# Allegro board extend-pcb.brd
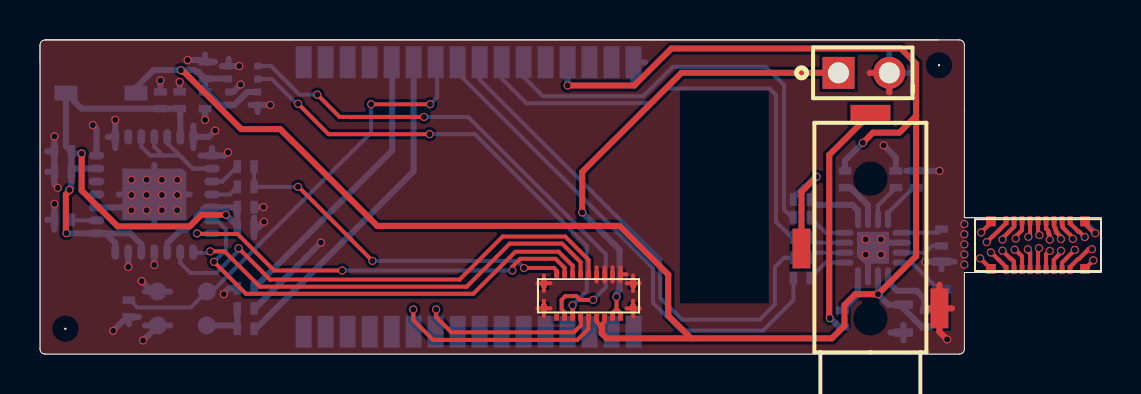
[diagram p0: board, top side]
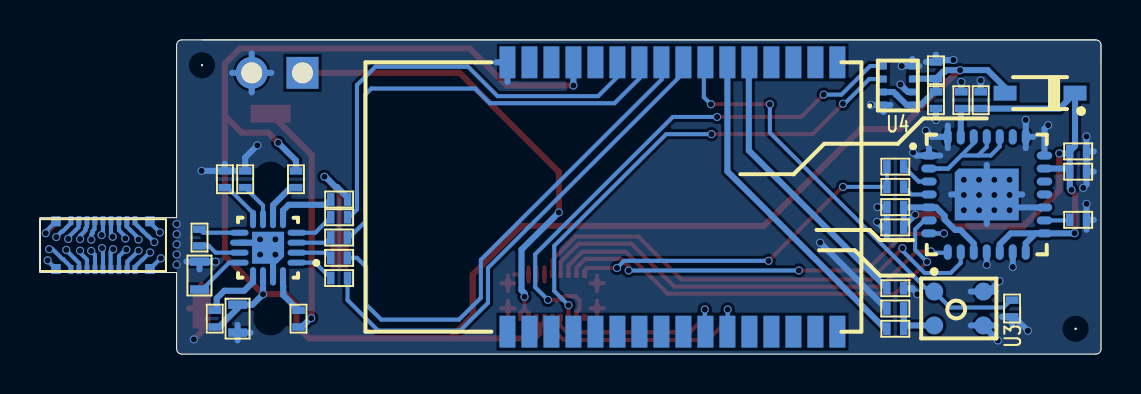
[diagram p1: board, bottom side, seen from below]

Outline 53.06 x 15.75 mm; copper layers: TOP, BOTTOM. Coordinates in mm from the lower left corner of the outline.
Outline path: 0,15.49 0,14.63 ; 0,15.49 arc(0.07,15.67) 0.25,15.75 ; 0,15.49 arc(0.07,15.67) 0.25,15.75 ; 0,15.49 0,0.25 ; 0,15.49 0,0.25 ; 0.25,15.75 45.97,15.75 ; 0.25,15.75 44.93,15.75 ; 0.25,15.75 45.97,15.75 ; 0,0.25 arc(0.07,0.07) 0.25,0 ; 0,0.25 arc(0.07,0.07) 0.25,0 ; 45.97,15.75 arc(46.15,15.67) 46.23,15.49 ; 45.97,15.75 arc(46.15,15.67) 46.23,15.49 ; 0.25,0 45.97,0 ; 0.25,0 45.97,0 ; 46.23,15.49 46.23,12.24 ; 46.23,15.49 46.23,12.24 ; 45.97,0 arc(46.15,0.07) 46.23,0.25 ; 45.97,0 arc(46.15,0.07) 46.23,0.25 ; 46.23,12.24 46.23,6.83 ; 46.23,12.24 46.23,6.83 ; 46.23,6.83 53.06,6.83 ; 46.23,6.83 53.06,6.83 ; 53.06,6.83 53.06,4.09 ; 53.06,6.83 53.06,4.09 ; 46.23,4.09 46.23,0.25 ; 46.23,4.09 46.23,0.25 ; 46.23,4.09 53.06,4.09 ; 46.23,4.09 53.06,4.09

## Design rules (mm)
net group INL+: nets INL+ N102512
net group INL-: nets INL- N102504
net group INR+: nets INR+ N102500
net group INR-: nets INR- N102508
net group N102000: nets N102000 N102004
net group NAV_INT: nets N113559 NAV_INT

## Placement (name value [footprint] x y rotation side)
C1  2.2uF  [0603]  43.18 1.78 270 bottom
C2  470nF  [0402]  38.1 3.81 0 bottom
C3  2.2uF  [0603]  45.09 3.94 270 bottom
C4  470nF  [0402]  38.1 4.83 0 bottom
C5  470nF  [0402]  38.1 5.84 0 bottom
C6  470nF  [0402]  10.29 1.27 180 bottom
C7  470nF  [0402]  38.1 6.86 0 bottom
C8  1uF  [0402]  45.09 5.84 270 bottom
C9  0.1uF  [0402]  4.45 2.29 270 bottom
C10  470nF  [0402]  10.29 3.3 180 bottom
C11  1uF  [0402]  43.81 8.76 90 bottom
C12  0.1uF  [0402]  8.26 14.22 270 bottom
C13  1uF  [0402]  8.26 12.73 90 bottom
C15  1uF  [0402]  6.02 12.73 270 bottom
C16  1uF  [0402]  1.14 6.73 180 bottom
C17  10nF  [0402]  6.99 12.73 270 bottom
C18  1uF  [0402]  1.14 9.14 0 bottom
C19  10nF  [0402]  1.14 10.16 0 bottom
C20  1uF  [0402]  10.29 7.37 180 bottom
C21  10nF  [0402]  10.29 6.35 180 bottom
D1  CMMSH1-40  [SOD123]  3.05 13.08 0 bottom
J1  PHONEJACK STEREO  [PHONEJACK-3P]  41.53 0.09 90 top
J2  CONN RECT 11x2  [MOLEX-BTB-18P-A]  27.43 2.92 180 top
J3  HEADER 2  [H-2]  39.93 14.1 0 top
J6  CONN RECT 11x2  [MOLEX-BTB-18P-B]  49.91 5.46 180 bottom
J7  CONN RECT 11x2  [MOLEX-BTB-18P-B]  49.91 5.46 180 top
M1  MTG  [MTG-100]  1.27 1.27 0 top
M2  MTG  [MTG-100]  44.96 14.48 0 top
NOREF  -  []  0 0.25 0 top
NOREF#2  -  []  0 1.52 0 top
NOREF#3  -  []  0 14.27 0 top
NOREF#4  -  []  0.33 0 90 top
NOREF#5  -  []  5.71 8 90 top
NOREF#6  -  []  0.38 0 90 top
NOREF#7  -  []  44.96 14.48 90 top
NOREF#8  -  []  44.96 14.48 0 top
NOREF#9  -  []  6.81 0 90 top
NOREF#10  -  []  0 1.24 0 top
NOREF#11  -  []  27.43 2.92 0 top
NOREF#12  -  []  31.55 0 90 top
NOREF#13  -  []  41.53 1.79 0 top
R1  10K  [0402]  44.32 1.78 90 bottom
R2  3.3K  [0402]  10.29 2.29 0 bottom
R3  10K  [0402]  40.26 8.76 90 bottom
R4  10K  [0402]  42.8 8.76 90 bottom
R5  NC  [0402]  10.29 8.38 180 bottom
R6  0  [0402]  10.29 9.4 180 bottom
R7  16  [0402]  38.1 7.75 180 bottom
R8  16  [0402]  40.13 1.78 270 bottom
U1  -  [BK8000L-MODULE]  11.98 1.12 90 bottom
U2  TPA6132A2  [TPA6132A2-QFN]  41.66 5.33 0 bottom
U3  -  [SPU0410HR5H-PB]  8.34 1.44 90 bottom
U4  BMP280  [BMP280-LGA8]  10.16 13.46 0 bottom
U5  ADBS-A320  [ADBS-A320-QFN]  5.71 8 180 bottom

## Library data of the parts
C1 C3 = Cap: signal model: DEFAULT_CAPACITOR_2.2e+06pF_2_1
C2 C4-C7 C10 = Cap: signal model: DEFAULT_CAPACITOR_470000pF_2_1
C8 C11 C13 C15 C16 C18 C20 = Cap: signal model: DEFAULT_CAPACITOR_1e+06pF_2_1
C9 C12 = Cap: signal model: DEFAULT_CAPACITOR_100000pF_2_1
C17 C19 C21 = Cap: signal model: DEFAULT_CAPACITOR_10000pF_2_1
D1 = 1n5819
J1 = PHONEJACK STEREO
J2 J6 J7 = CONN RECT 11x2
J3 = HEADER 2
M1 M2 = MTG
R1 R3 R4 = Res: signal model: DEFAULT_RESISTOR_10000OHM_2_1
R2 = Res: signal model: DEFAULT_RESISTOR_3300OHM_2_1
R5 = Res
R6 = Res: signal model: DEFAULT_RESISTOR_0.001OHM_2_1
R7 R8 = Res: signal model: DEFAULT_RESISTOR_16.000000OHM_2_1
U1 = BK8000L-MODULE
U2 = TPA6132A2
U3 = SPU0410HR5H-PB
U4 = BMP280_0
U5 = ADBS-A320_1

## Footprints (pads in the part's own frame, mm; a bottom-side part is the same pattern mirrored in y, then rotated)
0402
  rect 0.375x0.64 smd: 1(-0.42,0) 2(0.42,0)
0603
  rect 0.425x0.95 smd: 1(-0.7,0) 2(0.7,0)
ADBS-A320-QFN
  oval 0.775x0.4 smd: 1(-2.887,1.95) 2(-2.887,1.3) 3(-2.887,0.65) 4(-2.887,0) 5(-2.887,-0.65) 6(-2.887,-1.3) 7(-2.887,-1.95) 15(2.887,-1.95) 16(2.887,-1.3) 17(2.887,-0.65) 18(2.887,0) 19(2.887,0.65) 20(2.887,1.3) 21(2.887,1.95)
  oval 0.4x0.775 smd: 8(-1.95,-2.887) 9(-1.3,-2.887) 10(-0.65,-2.887) 11(0,-2.887) 12(0.65,-2.887) 13(1.3,-2.887) 14(1.95,-2.887) 22(1.95,2.887) 23(1.3,2.887) 24(0.65,2.887) 25(0,2.887) 26(-0.65,2.887) 27(-1.3,2.887) 28(-1.95,2.887)
  custom 3.2x2.6 smd: 29(0,0)
BK8000L-MODULE
  rect 1.6x0.8 smd: 1(0,17.7) 2(0,16.6) 3(0,15.5) 4(0,14.4) 5(0,13.3) 6(0,12.2) 7(0,11.1) 8(0,10) 9(0,8.9) 10(0,7.8) 11(0,6.7) 12(0,5.6) 13(0,4.5) 14(0,3.4) 15(0,2.3) 16(0,1.2) 17(13.5,1.2) 18(13.5,2.3) 19(13.5,3.4) 20(13.5,4.5) 21(13.5,5.6) 22(13.5,6.7) 23(13.5,7.8) 24(13.5,8.9) 25(13.5,10) 26(13.5,11.1) 27(13.5,12.2) 28(13.5,13.3) 29(13.5,14.4) 30(13.5,15.5) 31(13.5,16.6) 32(13.5,17.7)
BMP280-LGA8
  rect 0.35x0.35 smd: 1(0.725,0.975) 2(0.725,0.325) 3(0.725,-0.325) 4(0.725,-0.975) 5(-0.725,-0.975) 6(-0.725,-0.325) 7(-0.725,0.325) 8(-0.725,0.975)
H-2
  rect 1.6x1.6 hole 1.05: 1(0,0)
  round 1.6 hole 1.05: 2(2.54,0)
MOLEX-BTB-18P-A
  rect 0.24x0.35 smd: 1(-1.6,-1.075) 2(-1.6,1.075) 3(-1.2,-1.075) 4(-1.2,1.075) 5(-0.8,-1.075) 6(-0.8,1.075) 7(-0.4,-1.075) 8(-0.4,1.075) 9(0,-1.075) 10(0,1.075) 11(0.4,-1.075) 12(0.4,1.075) 13(0.8,-1.075) 14(0.8,1.075) 15(1.2,-1.075) 16(1.2,1.075) 17(1.6,-1.075) 18(1.6,1.075)
  rect 0.3x0.42 smd: 19(-2.23,-0.63) 20(-2.23,0.63) 21(2.23,-0.63) 22(2.23,0.63)
MOLEX-BTB-18P-B
  rect 0.24x0.45 smd: 1(-1.6,-1.225) 2(-1.6,1.225) 3(-1.2,-1.225) 4(-1.2,1.225) 5(-0.8,-1.225) 6(-0.8,1.225) 7(-0.4,-1.225) 8(-0.4,1.225) 9(0,-1.225) 10(0,1.225) 11(0.4,-1.225) 12(0.4,1.225) 13(0.8,-1.225) 14(0.8,1.225) 15(1.2,-1.225) 16(1.2,1.225) 17(1.6,-1.225) 18(1.6,1.225)
  rect 0.47x0.5 smd: 19(-2.35,-1.195) 20(-2.35,1.195) 21(2.35,-1.195) 22(2.35,1.195)
MTG-100
  round 0.1 hole 1 unplated: (0,0)
PHONEJACK-3P
  round 0.01 hole 1.4 unplated: (1.7,0) (8.7,0)
  rect 2x0.9 smd: 1(5.2,3.45) 3(2.2,-3.45)
  rect 0.9x2 smd: 2(11.95,0)
SOD123
  rect 1.15x0.75 smd: 1(-1.75,0) 2(1.75,0)
SPU0410HR5H-PB
  round 0.9 smd: 1(1.7,0) 2(1.7,-2.46) 3(0,-2.46) 4(0,0)
TPA6132A2-QFN
  oval 0.925x0.3 smd: 1(-1.437,0.75) 2(-1.437,0.25) 3(-1.437,-0.25) 4(-1.437,-0.75) 9(1.437,-0.75) 10(1.437,-0.25) 11(1.437,0.25) 12(1.437,0.75)
  oval 0.3x0.925 smd: 5(-0.75,-1.437) 6(-0.25,-1.437) 7(0.25,-1.437) 8(0.75,-1.437) 13(0.75,1.437) 14(0.25,1.437) 15(-0.25,1.437) 16(-0.75,1.437)
  custom 1.6x1.6 smd: 17(0,0)

## Nets
3.3V: C1.1 C12.2 C13.2 D1.2 J2.6 J2.8 R1.1 R3.2 U1.29(VBAT) U2.14(VDD) U4.2(CSB) U4.6(VDDIO) U4.8(VDD)
3V: C15.2 C17.2 C18.2 C19.2 C20.2 C21.2 D1.1 U5.5(VDDIO1) U5.10(NRST) U5.12(ORIENT) U5.14(VDDIO2) U5.15(IO_SELECT) U5.20(VDDA) U5.27(LED+)
GND: C1.2 C3.1 C9.2 C10.2 C11.2 C12.1 C13.1 C15.1 C16.2 C17.1 C18.1 C19.1 C20.1 C21.1 J1.3(C) J2.1 J2.3 J2.5 J2.7 J2.19 J2.20 J2.21 J2.22 J3.2 R2.2 R4.2 U1.32(GND5) U2.10(PGND) U2.15(SGND) U2.17(GND-PAD) U3.2(GND1) U3.3(GND2) U4.1(GND1) U4.5(SDO) U4.7(GND2) U5.1(GND1) U5.11(GND2) U5.13(SHTDWN) U5.17(NDREG_EN) U5.21(GND3) U5.22(GND4) U5.28(GND5) U5.29(GNP-PAD)
VBAT: J2.2 J2.4 J3.1
B1: J6.1 J7.2
B2: J6.2 J7.1
B3: J6.3 J7.4
B4: J6.4 J7.3
B5: J6.5 J7.6
B6: J6.6 J7.5
B7: J6.7 J7.8
B8: J6.8 J7.7
B9: J6.9 J7.10
B10: J6.10 J7.9
B11: J6.11 J7.12
B12: J6.12 J7.11
B13: J6.13 J7.14
B14: J6.14 J7.13
B15: J6.15 J7.16
B16: J6.16 J7.15
B17: J6.17 J7.18
B18: J6.18 J7.17
B19: J6.19 J7.20
B20: J6.20 J7.19
B21: J6.21 J7.22
B22: J6.22 J7.21
BT-RX: J2.12 U1.10(TX)
BT-TX: J2.10 U1.11(RX)
INL+: C4.1 U1.25(AUDIO_LP)
INL-: C2.1 U1.24(AUDIO_LN)
INR+: C5.1 U1.26(AUDIO_RP)
INR-: C7.1 U1.27(AUDIO_RN)
LED-: U5.2(XY-LED) U5.24(LED1-) U5.25(LED2-) U5.26(LED3-)
MIC_BIAS: C9.1 U1.23(VMIC) U3.1(VDD)
MICN: C10.1 U1.21(MICN)
MICP: C6.1 U1.22(MICP)
NAV_INT: J2.17 R5.1 R6.1
NAV_MISO: J2.11 U5.8(MISO)
NAV_MOSI: J2.13 U5.6(MOSI)
NAV_NSS: J2.9 U5.9(NCS)
NAV_SCK: J2.15 U5.7(SCK)
OUTL: R8.1 U2.16(OUTL)
OUTR: R7.1 U2.5(OUTR)
SCL: J2.16 U4.4(SCK)
SDA: J2.14 U4.3(SDI)
N101900: R4.1 U2.7(G1)
N101904: R3.1 U2.6(G0)
N101924: R1.2 U2.13(EN)
N101976: C3.2 U2.12(HPVDD)
N102000: C8.1 U2.9(CPN)
N102004: C8.2 U2.11(CPP)
N102032: C11.1 U2.8(HPVSS)
N102346: C6.2 R2.1 U3.4(OUT)
N102500: C5.2 U2.3(INR+)
N102504: C2.2 U2.1(INL-)
N102508: C7.2 U2.4(INR-)
N102512: C4.2 U2.2(INL+)
N109388: C16.1 U5.16(DVDD)
N113559: R6.2 U5.3(MOTION)
N113563: R5.2 U5.4(GPIO)
N1018520: J1.1(A) R7.2
N1018521: J1.2(B) R8.2

Pads without a net: J2 18; U1 1 2 3 4 5 6 7 8 9 12 13 14 15 16 17 18 19 20 28 30 31; U5 18 19 23

## Via types
v1: diameter 0.406, hole 0.305, TOP to BOTTOM, 101 vias

## Routing (per net, layer and track width the routed paths; a pad name or vN(x,y) marks a point on that pad's centre or on a via; arc(x,y) is an arc through that point)
3.3V: length 99.9
  TOP w0.203: 28.09,1.42 28.09,1.49 28.23,1.63 J2.6 ; J2.8 27.83,1.63 28.04,1.42
  TOP w0.305: 43.81,11.94 43.81,4.91 v1(41.91,3) 40.77,3 40.23,2.46 40.23,1.42 39.6,0.79 32.56,0.79 ; 43.81,11.94 43.81,14.55 43.05,15.32 31.57,15.32 29.72,13.46 v1(26.38,13.46) ; 43.81,11.94 42.98,11.1 41.66,11.1 v1(41.15,10.59) ; 32.56,0.79 28.35,0.79 28.09,1.04 ; 32.56,0.79 31.42,1.93 31.42,3.99 28.98,6.43 16.87,6.43 12.01,11.28 10.07,11.28 7.21,14.14 7.14,14.14 v1(7.05,14.23) ; 28.09,1.04 28.09,1.42 ; 28.09,1.04 28.09,1.37 28.04,1.42
  BOTTOM w0.305: D1.2 4.8,13.36 5.67,14.23 v1(7.05,14.23) 7.73,14.23 7.81,14.15 7.91,14.15 C12.2 ; R3.2 40.26,9.7 v1(41.15,10.59) ; v1(26.38,13.46) U1.29 ; C12.2 9.42,13.8 U4.6 ; C12.2 C13.2 8.34,13.15 8.69,12.8 8.7,12.8 9.01,12.49 U4.8 9.44,12.48 9.72,12.48 10.24,13 10.24,13 10.38,13.14 U4.2 ; R1.1 44.11,1.36 43.18,2.29 C1.1 42.43,2.48 v1(41.91,3) U2.14
3V: length 38.8
  TOP w0.305: v1(2.08,10.06) 2.08,8.2 3.89,6.4 7.49,6.4 8.07,6.99 v1(9.3,6.99) ; v1(1.32,6.06) 1.32,6.07 1.3,6.1 1.3,8 1.47,8.18 v1(1.47,8.23)
  BOTTOM w0.305: 3.27,6.05 3.76,5.56 U5.14 ; 3.27,6.05 U5.15 1.34,6.05 1.33,6.06 v1(1.32,6.06) ; 3.27,6.05 4.52,6.05 5.06,5.5 U5.12 ; 9.87,6.41 C20.2 9.85,7.35 U5.5 8.24,7.35 7.82,6.93 7.82,6.76 7.29,6.22 7.04,6.22 6.37,5.55 U5.10 ; 9.87,6.41 v1(9.3,6.99) ; 9.87,6.41 C21.2 ; C18.2 C19.2 ; C18.2 1.72,9.3 U5.20 ; C18.2 1.56,8.32 v1(1.47,8.23) ; C19.2 1.3,10.42 D1.1 2.07,12.31 C15.2 C17.2 7.01,12.28 U5.27 ; C19.2 1.66,10.06 v1(2.08,10.06)
GND: length 74.9
  TOP w0.203: J2.19 29.66,3.94 ; J2.19 29.66,3.16 ; J2.19 29.99,3.55 ; J2.19 29.33,3.55 ; J2.22 25.53,2.29 ; J2.22 24.87,2.29 ; J2.22 25.2,2.68 ; J2.22 25.2,1.9 ; 25.2,3.16 J2.21 ; J2.21 25.53,3.55 ; J2.21 24.87,3.55 ; J2.21 25.2,3.94 ; 29.66,1.9 J2.20 ; J2.20 29.33,2.29 ; J2.20 29.66,2.68 ; J2.20 29.99,2.29 ; 29.03,3.64 J2.1 ; J2.1 29.03,4.35 ; J2.1 29.33,4 ; 28.63,4.35 J2.3 28.63,3.64 ; 28.23,3.64 J2.5 28.23,4.35 ; 27.83,3.64 J2.7 27.83,4.35
  TOP w0.305: 44.35,2.29 J1.3 ; J1.3 45.61,2.29 ; J1.3 44.98,3.47 ; J1.3 44.98,1.12 v1(45.36,0.74) ; 41.5,14.1 J3.2 42.47,13.12
  BOTTOM w0.305: C17.1 v1(6.99,13.64) ; 3.94,8 U5.29 ; U5.29 7.49,8 ; U5.29 5.71,6.52 ; U5.29 5.06,7.35 U5.17 ; U5.29 5.71,9.48 ; 0.72,6.23 C16.2 ; C16.2 v1(0.72,7.53) ; C16.2 0.36,6.73 ; v1(9.4,10.11) 9.24,9.95 U5.1 ; J3.2 43.45,14.1 ; J3.2 42.47,15.07 ; J3.2 41.5,14.1 ; J3.2 42.47,13.12 ; C9.2 4.36,1.87 v1(3.66,1.17) ; C9.2 4.94,1.87 ; C9.2 4.45,1.5 ; U3.3 5.88,1.41 v1(5.16,0.69) ; U3.3 6.51,1.44 ; U3.3 5.25,1.44 ; v1(44.28,4.63) 44.29,4.64 C3.1 ; C18.1 0.72,8.5 v1(0.89,8.33) ; C18.1 0.72,9.64 ; C18.1 0.36,9.14 ; v1(8.76,11.2) 8.45,10.89 U5.28 ; C21.1 10.71,6.85 ; C21.1 10.92,6.35 v1(11.2,6.63) ; C21.1 10.71,5.85 ; U4.5 v1(9.97,14.44) ; U4.5 9.08,14.44 ; U4.5 9.44,14.79 ; 5.25,3.14 U3.2 ; U3.2 5.6,3.14 v1(5.08,3.66) ; U3.2 6.51,3.14 ; 0.36,10.16 C19.1 ; C19.1 0.72,9.66 ; C19.1 v1(0.72,10.91) ; U5.1 8.6,10.33 ; U5.1 8.04,9.95 ; C12.1 8.06,14.64 7.96,14.74 v1(7.38,14.74) ; C12.1 8.26,15.01 ; C12.1 8.75,14.64 ; U4.1 v1(11.52,12.49) ; U4.1 10.88,12.13 ; U4.1 10.53,12.49 ; U4.7 9.66,13.14 v1(10.03,13.51) ; C3.1 45.74,4.64 ; C3.1 45.09,4.25 ; C13.1 v1(8.26,11.73) ; C1.2 43.18,1.47 ; C1.2 42.53,1.08 ; C1.2 43.18,0.69 ; U2.10 41.91,5.58 U2.17 41.41,5.08 U2.15 ; C10.2 9.45,3.3 9.19,3.04 v1(9.19,3) ; v1(2.64,11.48) 2.83,11.29 U5.21 ; U5.28 7.67,11.45 ; U5.28 7.67,10.32 ; U5.22 v1(3.76,11.74) ; U5.22 3.76,10.32 ; U5.22 3.39,10.89 ; 30.26,14.62 U1.32 29.68,13.65 ; C15.1 v1(6.02,13.72) ; R4.2 42.8,9.86 v1(42.19,10.46) ; v1(14.05,5.59) 10.74,2.29 R2.2 ; U5.11 v1(5.71,4.47) ; C11.2 43.81,9.55 ; C11.2 v1(44.98,9.18) ; C11.2 43.32,9.18 ; U5.13 v1(4.42,4.36) ; C20.1 v1(11.18,7.37)
  vias: v1(4.57,8.74) v1(4.57,7.97) v1(4.57,7.21) v1(5.33,8.74) v1(5.33,7.97) v1(5.33,7.21) v1(6.1,8.74) v1(6.1,7.97) v1(6.1,7.21) v1(6.86,8.74) v1(6.86,7.97) v1(6.86,7.21) v1(41.29,5.75) v1(41.29,4.99) v1(42.05,5.75) v1(42.05,4.99) v1(46.23,6.52) v1(46.23,6.01) v1(46.23,5.5) v1(46.23,4.99) v1(46.23,4.49)
VBAT: length 23.6
  TOP w0.203: 28.83,2.26 28.63,2.06 J2.4 ; 28.83,2.26 28.83,2.26 29.03,2.06 J2.2 ; 28.83,2.26 v1(28.83,2.87)
  TOP w0.305: J3.1 32.08,14.1 27.11,9.13 v1(27.11,7.1)
  BOTTOM w0.305: v1(27.11,7.1) 28.98,5.23 28.98,3.2 28.83,3.05 v1(28.83,2.87)
B1: length 3.2
  TOP w0.203: v1(52.6,5.26) 52.45,5.26 51.96,4.77 51.92,4.77 51.51,4.36 J7.2
  BOTTOM w0.203: v1(52.6,5.26) 52.43,5.26 51.94,4.77 51.91,4.77 51.51,4.37 J7.2
B2: length 2.3
  TOP w0.203: v1(52.25,5.87) 51.96,6.15 51.92,6.15 51.58,6.49 51.52,6.56 51.52,6.68 J7.1
  BOTTOM w0.203: J7.1 51.51,6.56 51.77,6.3 51.77,6.3 51.92,6.15 51.96,6.15 v1(52.25,5.87)
B3: length 2.5
  TOP w0.203: v1(51.75,5.22) 51.11,4.59 J7.4
  BOTTOM w0.203: v1(51.75,5.22) 51.64,5.12 51.64,5.1 51.1,4.56 51.1,4.24 J7.4
B4: length 2.3
  TOP w0.203: J7.3 51.11,6.5 51.14,6.47 51.14,6.36 51.65,5.84 v1(51.65,5.77)
  BOTTOM w0.203: v1(51.65,5.77) 51.65,5.84 51.14,6.36 51.14,6.66 J7.3
B5: length 2.2
  TOP w0.203: v1(51.06,5.18) 51.06,5.08 50.7,4.72 50.7,4.25 J7.6
  BOTTOM w0.203: v1(51.06,5.18) 51.06,5.08 50.71,4.74 J7.6
B6: length 2.1
  TOP w0.203: J7.5 50.71,6.4 50.74,6.37 50.74,6.36 50.78,6.31 50.78,6.21 50.83,6.16 50.83,6.1 51.04,5.88 51.04,5.78 v1(51.05,5.77)
  BOTTOM w0.203: J7.5 50.71,6.39 50.78,6.32 50.78,6.21 51.05,5.93 v1(51.05,5.77)
B7: length 2
  TOP w0.203: J7.8 50.31,5 50.48,5.17 v1(50.5,5.17)
  BOTTOM w0.203: J7.8 50.31,4.97 50.5,5.16 v1(50.5,5.17)
B8: length 2.1
  TOP w0.203: 50.51,5.75 50.5,5.74 v1(50.5,5.73) 50.47,5.76 50.47,6.02 50.43,6.06 50.43,6.18 50.31,6.29 J7.7
  BOTTOM w0.203: J7.7 50.34,6.66 50.34,6.26 50.43,6.17 50.43,6.06 50.5,5.99 50.5,5.74 ; 50.51,5.75 50.5,5.74 ; 50.5,5.74 v1(50.5,5.73)
B9: length 2.2
  TOP w0.203: J7.10 49.91,5.26 v1(49.96,5.31)
  BOTTOM w0.203: v1(49.96,5.31) 49.91,5.26 J7.10
B10: length 1.5
  TOP w0.203: v1(49.98,5.97) 49.91,6.03 J7.9
  BOTTOM w0.203: v1(49.98,5.97) 49.91,6.03 J7.9
B11: length 2.1
  TOP w0.203: J7.12 49.51,5.04 49.43,5.12 49.43,5.23 v1(49.4,5.26)
  BOTTOM w0.203: v1(49.4,5.26) 49.53,5.13 49.53,4.26 J7.12
B12: length 1.7
  TOP w0.203: J7.11 49.51,5.96 v1(49.43,5.88)
  BOTTOM w0.203: v1(49.43,5.88) 49.51,5.96 J7.11
B13: length 2.3
  TOP w0.203: v1(48.74,5.23) 48.77,5.23 49.11,4.9 J7.14
  BOTTOM w0.203: J7.14 49.11,4.9 48.78,5.23 v1(48.74,5.23)
B14: length 2.1
  TOP w0.203: v1(48.79,5.79) 48.79,5.9 49.11,6.21 J7.13
  BOTTOM w0.203: J7.13 49.11,6.21 48.79,5.89 v1(48.79,5.79)
B15: length 2.4
  TOP w0.203: J7.16 48.71,4.65 48.58,4.78 48.54,4.78 v1(48.13,5.18)
  BOTTOM w0.203: J7.16 48.69,4.26 48.69,4.62 v1(48.13,5.18)
B16: length 2.4
  TOP w0.203: v1(48.13,5.74) 48.13,5.8 48.71,6.38 J7.15
  BOTTOM w0.203: J7.15 48.74,6.66 48.74,6.41 48.54,6.21 48.24,5.91 48.24,5.84 v1(48.13,5.74)
B17: length 2.4
  TOP w0.203: J7.18 48.31,4.36 47.95,4.72 47.94,4.72 47.57,5.09 v1(47.55,5.09)
  BOTTOM w0.203: J7.18 48.31,4.37 47.96,4.72 47.94,4.72 47.57,5.09 v1(47.55,5.09)
B18: length 3
  TOP w0.203: v1(47.35,5.61) 47.66,5.92 47.67,5.92 47.94,6.2 47.95,6.2 48.31,6.56 J7.17
  BOTTOM w0.203: J7.17 48.31,6.56 47.95,6.2 47.94,6.2 47.67,5.92 47.66,5.92 v1(47.35,5.61)
B19: length 1.2
  TOP w0.203: v1(52.68,4.7) 52.26,4.28 J7.20
  BOTTOM w0.203: J7.20 52.68,4.68 v1(52.68,4.7)
B20: length 1.6
  TOP w0.203: J7.19 52.26,6.51 52.72,6.06 v1(52.77,6.06)
  BOTTOM w0.203: J7.19 52.77,6.15 52.77,6.07 v1(52.77,6.06)
B21: length 1.5
  TOP w0.203: v1(47.02,4.8) 47.55,4.27 J7.22
  BOTTOM w0.203: J7.22 47.03,4.8 v1(47.02,4.8)
B22: length 1.5
  TOP w0.203: v1(47.07,6.1) 47.07,6.1 47.56,6.59 J7.21
  BOTTOM w0.203: v1(47.07,6.1) 47.07,6.1 47.56,6.59 J7.21
BT-RX: length 9.6
  TOP w0.203: J2.12 27.05,1.83 27.05,1.44 26.7,1.09 20.57,1.09 19.81,1.85 v1(19.81,2.24)
  BOTTOM w0.203: U1.10 19.81,1.15 v1(19.81,2.24)
BT-TX: length 11.6
  TOP w0.203: v1(18.67,2.24) 18.67,1.7 19.66,0.71 26.87,0.71 27.43,1.26 27.43,1.84 J2.10
  BOTTOM w0.203: v1(18.67,2.24) 18.67,1.14 U1.11
INL+: length 25.1
  BOTTOM w0.203: U1.25 21.97,14.61 21.97,13.77 31.01,4.72 31.01,2.82 32.11,1.73 35.99,1.73 36.75,2.49 36.75,4.37 37.21,4.83 C4.1
INL-: length 25.4
  BOTTOM w0.203: C2.1 37.68,2.7 36.16,1.18 32.04,1.18 30.66,2.57 30.66,4.32 20.93,14.05 20.93,14.58 U1.24
INR+: length 23
  BOTTOM w0.203: C5.1 37.59,5.84 36.8,6.63 36.8,13 36.49,13.31 31.29,13.31 30.56,12.57 24.33,12.57 23.08,13.82 U1.26
INR-: length 22
  BOTTOM w0.203: C7.1 37.59,6.86 37.21,7.24 37.21,13.48 36.29,14.4 31.65,14.4 30.18,12.93 25.15,12.93 24.18,13.89 U1.27
LED-: length 8.7
  BOTTOM w0.203: 6.15,9.95 5.52,9.95 5.06,10.4 U5.24 ; 6.15,9.95 5.71,10.39 U5.25 ; 6.15,9.95 6.99,9.95 7.65,9.3 8.6,9.3 U5.2 7.64,9.3 6.37,10.58 U5.26
MIC_BIAS: length 22.5
  TOP w0.203: v1(16.56,12.52) v1(19.51,12.52)
  BOTTOM w0.203: U1.23 19.86,14.55 19.86,12.88 v1(19.51,12.52) ; v1(16.56,12.52) 16.56,11.1 8.6,3.14 U3.1 7.54,2.34 4.88,2.34 4.51,2.71 C9.1
MICN: length 14.2
  BOTTOM w0.305: C10.1 17.61,10.21 17.61,14.59 U1.21
MICP: length 16.7
  BOTTOM w0.305: C6.1 10.79,1.27 18.68,9.16 U1.22
NAV_INT: length 18.1
  TOP w0.203: v1(12.9,8.38) 12.93,8.38 15.57,5.74 15.57,5.73 v1(16.62,4.67) ; J2.17 25.84,4 25.84,4.19 25.7,4.32 v1(24.21,4.32)
  BOTTOM w0.203: R6.1 R5.1 v1(12.9,8.38) ; v1(24.21,4.32) 23.85,4.67 v1(16.62,4.67)
NAV_MISO: length 22.1
  TOP w0.203: v1(8.51,5.15) 9.23,5.15 11,3.38 21.34,3.38 23.5,5.54 26.11,5.54 27.03,4.62 J2.11
  BOTTOM w0.203: v1(8.51,5.15) 8.53,5.15 8.53,5.08 7.7,5.08 U5.8
NAV_MOSI: length 22.9
  TOP w0.203: v1(8.7,4.62) 10.3,3.02 21.67,3.02 23.77,5.13 25.93,5.13 26.63,4.43 J2.13
  BOTTOM w0.203: U5.6 8.84,6.7 9.3,6.25 9.3,5.22 v1(8.7,4.62)
NAV_NSS: length 24.5
  TOP w0.203: v1(9.93,5.31) 11.51,3.73 20.98,3.73 23.14,5.89 26.26,5.89 27.43,4.72 J2.9
  BOTTOM w0.203: v1(9.93,5.31) 9.93,5.18 8.81,4.06 7.52,4.06 7.01,4.57 U5.9
NAV_SCK: length 20.8
  TOP w0.203: v1(23.62,4.19) 23.62,4.38 24.02,4.78 25.79,4.78 26.23,4.33 J2.15 ; v1(7.85,6.05) 7.89,6.02 9.88,6.02 11.71,4.19 v1(15.11,4.19)
  BOTTOM w0.203: v1(15.11,4.19) v1(23.62,4.19) ; U5.7 v1(7.85,6.05)
OUTL: length 2
  BOTTOM w0.305: U2.16 40.91,3.41 40.9,3.41 40.9,2.99 40.91,2.98 40.91,2.97 R8.1
OUTR: length 3
  BOTTOM w0.305: R7.1 38.78,7.48 40.62,7.48 40.91,7.2 U2.5
SCL: length 26.5
  TOP w0.203: v1(27.66,2.72) 27.01,2.72 26.82,2.91 26.28,2.91 26.09,2.72 26.09,2.25 26.23,2.1 J2.16 ; v1(19.2,11.89) 14.99,11.89 v1(13.87,13)
  BOTTOM w0.203: v1(13.87,13) 12.98,13 11.55,14.44 U4.4 ; v1(19.2,11.89) 21.41,11.89 28.3,5 28.3,3.35 v1(27.66,2.72)
SDA: length 23.8
  TOP w0.203: v1(26.63,2.45) J2.14 ; v1(19.48,11.02) 14.43,11.02 v1(12.9,12.55)
  BOTTOM w0.203: v1(19.48,11.02) 21.74,11.02 27.34,5.42 27.34,3.16 v1(26.63,2.45) ; v1(12.9,12.55) 12.83,12.55 11.59,13.79 U4.3
N101900: length 1.9
  BOTTOM w0.203: U2.7 41.91,7.45 R4.1
N101904: length 2.2
  BOTTOM w0.305: R3.1 40.53,8.34 41.41,7.46 U2.6
N101924: length 3.1
  BOTTOM w0.305: U2.13 42.41,3.62 42.85,3.17 43.84,3.17 44.22,2.79 44.22,2.3 R1.2
N101976: length 2.5
  BOTTOM w0.203: U2.12 43.6,4.58 44.95,3.24 C3.2
N102000: length 2.1
  BOTTOM w0.203: U2.9 44.91,6.08 C8.1
N102004: length 2.1
  BOTTOM w0.203: C8.2 45.07,5.44 44.63,5.44 44.28,5.08 U2.11
N102032: length 2.2
  BOTTOM w0.203: C11.1 43.67,8.34 42.41,7.07 U2.8
N102346: length 2.6
  BOTTOM w0.305: R2.1 C6.2 9.7,1.44 U3.4
N102500: length 1.8
  BOTTOM w0.203: C5.2 38.78,5.58 U2.3
N102504: length 2
  BOTTOM w0.203: U2.1 39.29,4.58 C2.2
N102508: length 2
  BOTTOM w0.203: C7.2 39.29,6.08 U2.4
N102512: length 1.8
  BOTTOM w0.203: C4.2 38.78,5.08 U2.2
N109388: length 1.3
  BOTTOM w0.203: U5.16 1.59,6.7 C16.1
N113559: length 1.6
  BOTTOM w0.203: U5.3 9.12,8.65 R6.2
N113563: length 1.4
  BOTTOM w0.203: R5.2 9.49,8 U5.4
N1018520: length 5.6
  TOP w0.305: v1(38.84,8.89) 38.08,8.13 J1.1
  BOTTOM w0.305: v1(38.84,8.89) 38.79,8.89 38.27,8.37 38.21,8.37 37.68,7.85 R7.2
N1018521: length 11.9
  TOP w0.305: J1.2 39.47,9.98 39.47,1.85 39.5,1.82 v1(39.5,1.8)
  BOTTOM w0.305: R8.2 39.97,1.36 39.52,1.8 v1(39.5,1.8)

## Copper pours and planes (outline as drawn; the poured copper is in the pictures)
GND on TOP: 0.25,0.01 0.08,0.08 0.01,0.25 0.01,15.49 0.08,15.67 0.25,15.74 45.97,15.74 46.15,15.67 46.22,15.49 46.22,6.82 46.23,6.82 46.23,4.1 46.22,4.1 46.22,0.25 46.15,0.08 45.97,0.01 ; 1 cut-out
GND on BOTTOM: 0.25,0.01 0.08,0.08 0.01,0.25 0.01,15.49 0.08,15.67 0.25,15.74 45.97,15.74 46.15,15.67 46.22,15.49 46.22,6.82 46.23,6.82 46.23,4.1 46.22,4.1 46.22,0.25 46.15,0.08 45.97,0.01 ; 10 cut-outs

## Text on the board
DISPLAY_BOTTOM: FIGURE | SIZE | 12.0 | 41.339 | 39.37 | 55.118 | DRILL CHART: TOP to BOTTOM | ALL UNITS ARE IN MILS | PLATED | NON-PLATED | QTY | 101 | 2
